# Altium PCB USB_CAN_Z69.PcbDoc
Units mm, origin at the board's own origin, x right, y up, seen from the top; angles counter-clockwise.
Board outline 43.25 x 41.95 mm, 2 copper layers (Top Layer, Bottom Layer); 36 components, 25 nets, 154 pads, 18 vias.
Unrouted connection lines stored in the file: 2.
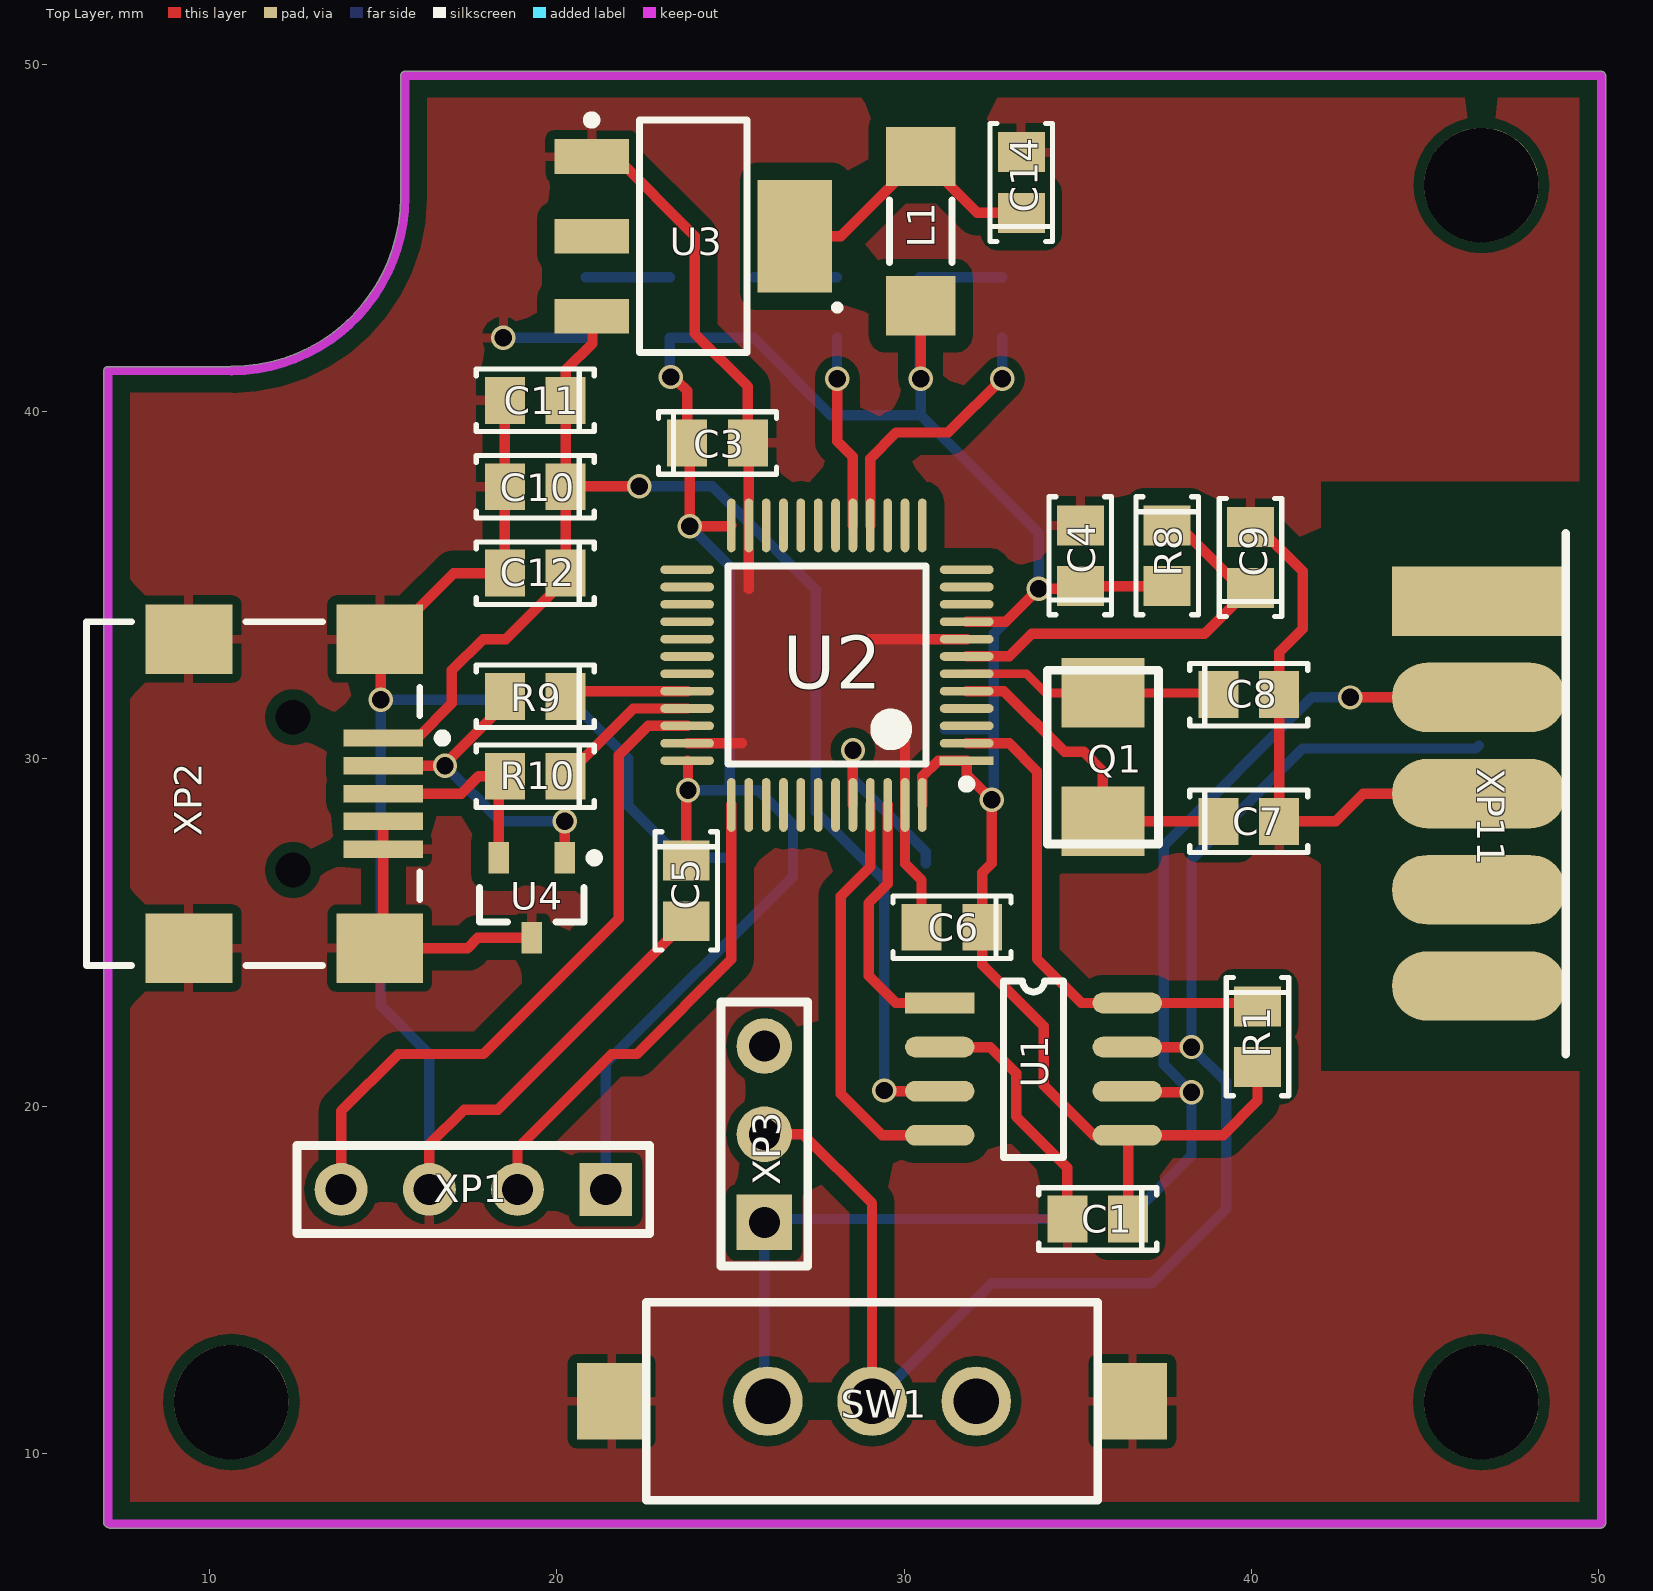
[diagram p0: Top Layer view]
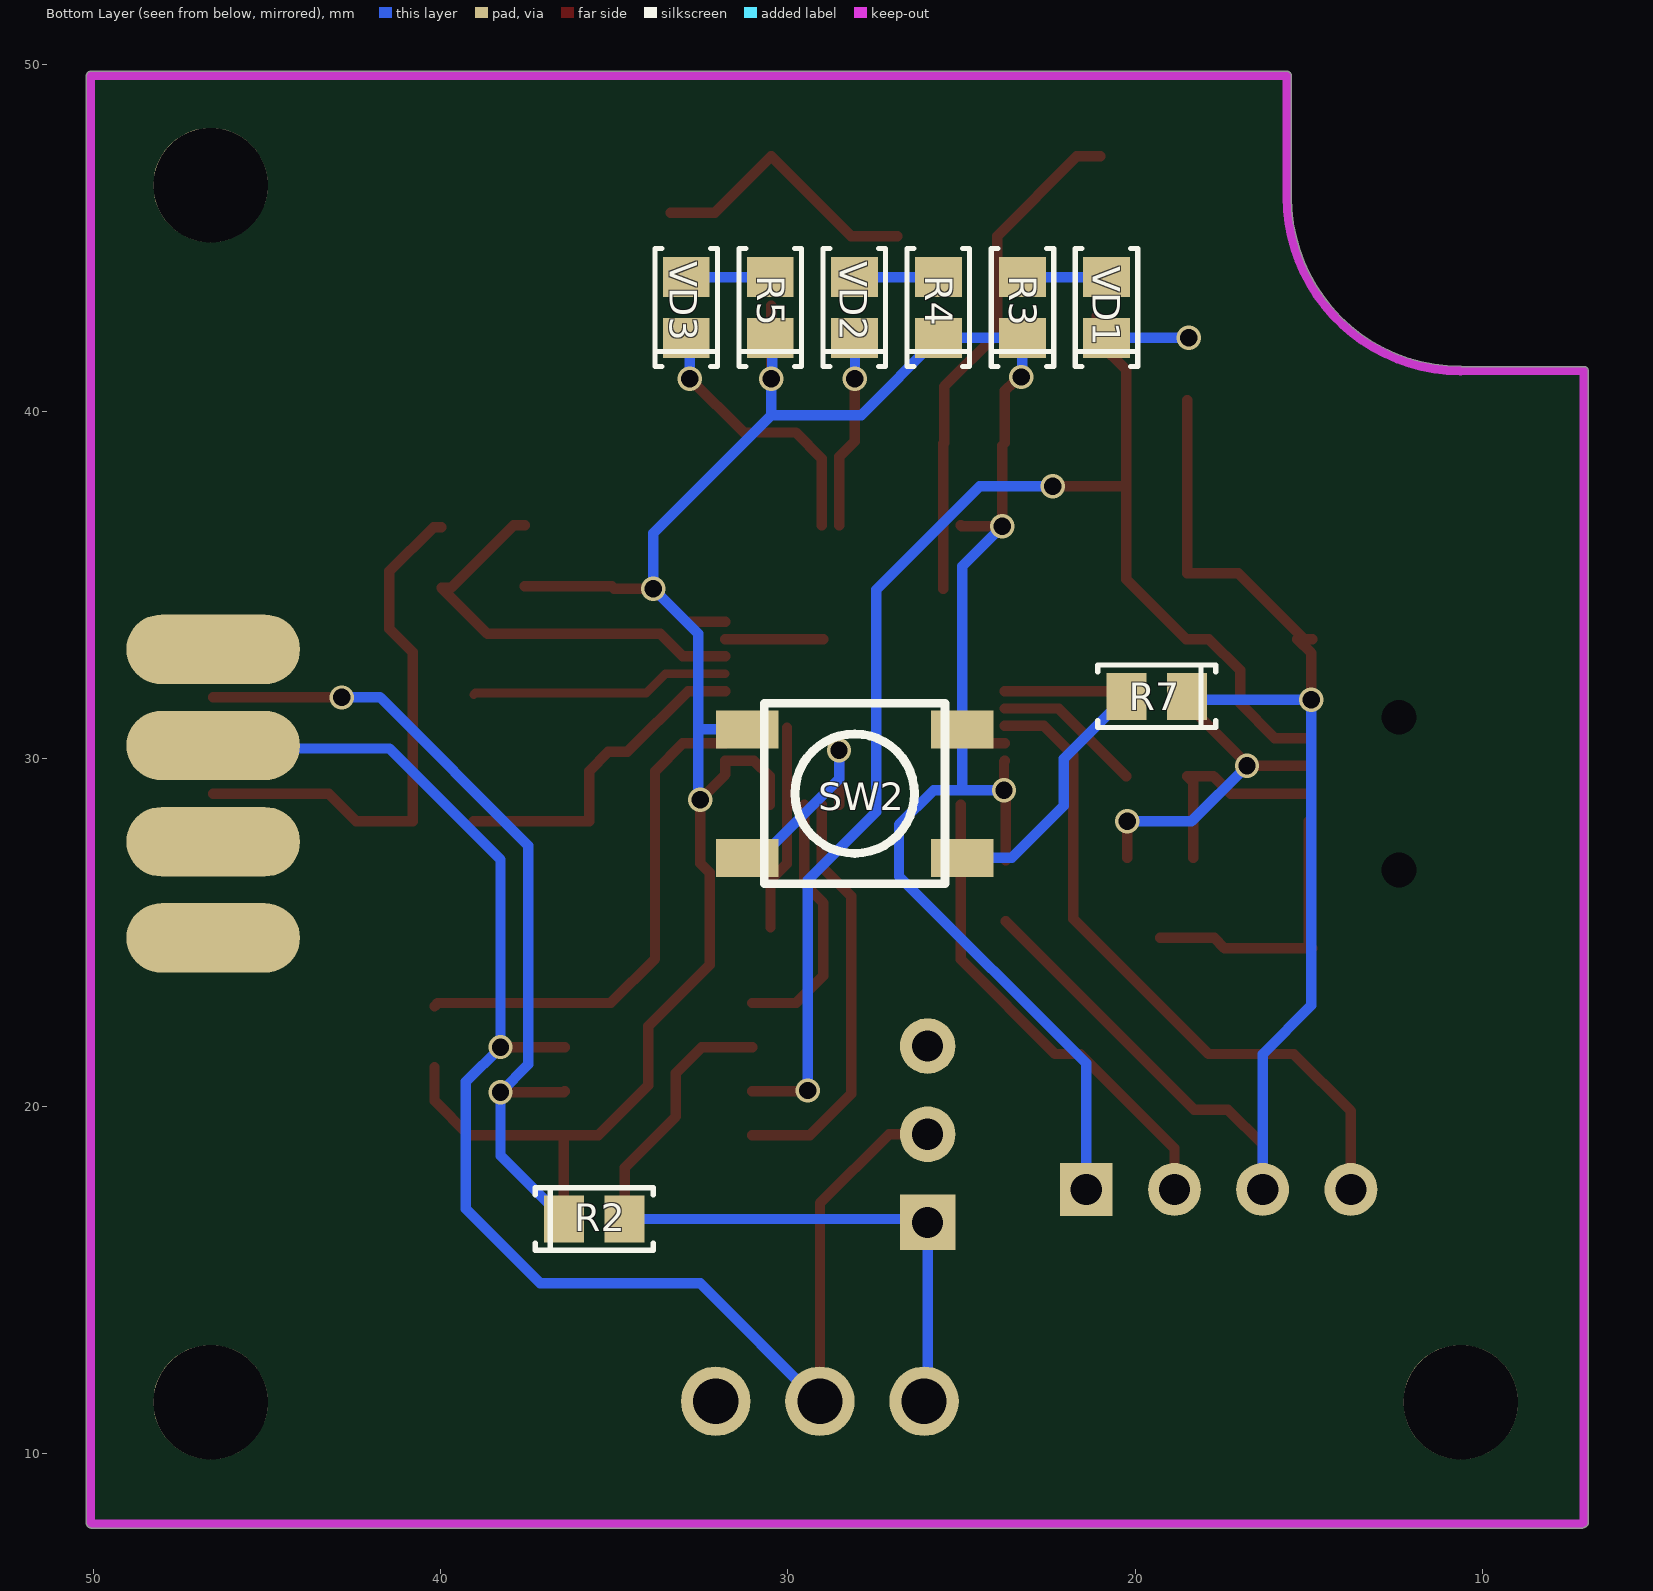
[diagram p1: Bottom Layer view, seen from below]

## Layer stack, top to bottom
Top Solder: solder mask 0.0102, Solder Resist, Dk 3.5
Top Layer: signal copper 0.0356
Dielectric 1: dielectric 0.32, FR-4, Dk 4.8
Bottom Layer: signal copper 0.0356
Bottom Solder: solder mask 0.0102, Solder Resist, Dk 3.5

## Board outline
7.045,7.878 cw(c7.075,8) 6.95,8 6.95,41.175 cw(c7.075,41.175) 7.075,41.3 10.603,41.3 cw(c10.625,41.175) 10.625,41.302 ccw(c10.625,46.175) 15.498,46.175 cw(c15.625,46.175) 15.5,46.197 15.5,49.675 cw(c15.625,49.675) 15.625,49.8 50.075,49.8 cw(c50.075,49.675) 50.2,49.675 50.2,8 cw(c50.075,8) 50.2,7.994 cw(c50.075,7.988) 50.2,7.988 cw(c50.075,7.988) 50.164,7.899 50.151,7.886 50.151,7.887 cw(c50.062,7.975) 50.062,7.85 7.125,7.85 cw(c7.125,7.975)

## Design rules (kind name [scope] priority, off if disabled: settings)
BoardOutlineClearance [OnLayer('Top Overlay')] p1: gap=0.254 ignorepadtopadclearanceinfootprint=FALSE except(0: Arc-SplitContinuation Track-SplitContinuation SMDPad-SplitContinuation THPad-SplitContinuation Via-SplitContinuation Fill-SplitContinuation Poly-SplitContinuation Region-SplitContinuation Text-SplitContinuation)
Clearance Clearance_1 [InNamedPolygon('Top Layer-GND')] p1: gap=0.254 ignorepadtopadclearanceinfootprint=FALSE except(0: Arc-Hole Track-Hole SMDPad-Hole THPad-Hole Via-Hole Fill-Hole Poly-Hole Region-Hole Text-Hole; 0.3: THPad-Fill THPad-Poly THPad-Region Via-Fill Via-Poly Via-Region; 0.4: Fill-Fill Fill-Poly Fill-Region Poly-Poly Poly-Region Region-Region; 0.5: Arc-Fill Arc-Poly Arc-Region Track-Fill Track-Poly Track-Region SMDPad-Fill SMDPad-Poly SMDPad-Region)
Clearance [All] p2: gap=0.254 ignorepadtopadclearanceinfootprint=FALSE except(0: Arc-Hole Track-Hole SMDPad-Hole THPad-Hole Via-Hole Fill-Hole Poly-Hole Region-Hole Text-Hole; 0.2: Arc-Arc Arc-Track Arc-SMDPad Track-Track Track-SMDPad SMDPad-SMDPad; 0.3: Via-Fill Via-Poly Via-Region Fill-Fill Fill-Poly Fill-Region Poly-Poly Poly-Region Region-Region; 0.4: Arc-Fill Arc-Poly Arc-Region Track-Fill Track-Poly Track-Region SMDPad-Fill SMDPad-Poly SMDPad-Region THPad-Fill THPad-Poly THPad-Region)
HoleSize [All] p1: absolutevalues=TRUE maxlimit=3 minlimit=0.3 maxpercent=80.000 minpercent=20.000
PolygonConnect [All] p1: connectstyle=Relief reliefconductorwidth=0.254 reliefentries=4 polygonreliefangle="90 Angle" airgapwidth=0.254
RoutingVias [All] p1: holewidth=0.5 width=0.7 viastyle="Through Hole" minholewidth=0.3 minwidth=0.5 maxholewidth=0.5 maxwidth=0.7
SolderMaskExpansion [All] p1: expansion=0.102
UnRoutedNet [All] p1: checkbadconnections=TRUE
Width [All] p1: maxlimit=0.4 minlimit=0.2 preferedwidth=0.25 minimp=50.000000 maximp=50.000000 favimp=50.000000
28 further rules are at their usual default settings.

## Classes and differential pairs
component class CAN: C1 R1 R2 SW1 U1 XP3 XP11
component class MCU: C3 C4 C5 C6 C7 C8 C9 Q1 R3 R4 R5 R7 R8 SW2 U2 VD1 VD2 VD3 XP1
component class PWR: C10 C11 C12 C14 L1 U3
component class USB: R9 R10 U4 XP2

## Components (designator, comment, footprint, x,y, rotation, side; value= is the part's Value field where it differs from the comment)
C1 "" SMD_0805 35.575,16.75 r180 top value=100nF
C3 "100nF" SMD_0805 24.625,39.1 r0 top
C4 "100nF" SMD_0805 35.075,35.85 r90 top
C5 "100nF" SMD_0805 23.725,26.2 r270 top
C6 "100nF" SMD_0805 31.375,25.15 r180 top
C7 "22pF" SMD_0805 39.925,28.2 r0 top
C8 "22pF" SMD_0805 39.925,31.85 r0 top
C9 "100nF" SMD_0805 39.975,35.8 r90 top
C10 "1uF" SMD_0805 19.375,37.837 r180 top
C11 "1uF" SMD_0805 19.375,40.325 r180 top
C12 "1uF" SMD_0805 19.375,35.35 r180 top
C14 "100n" SMD_0805 33.375,46.6 r90 top
L1 "" INDC4516AM 30.475,45.2 r270 top
Q1 "8MHz" 5032-2Pin_CRYSTAL 35.725,30.05 r90 top
R1 "10k" SMD_0805 40.175,22 r270 top
R2 "120" SMD_0805 35.575,16.75 r180 bottom
R3 "10k" SMD_0805 23.245,43 r90 bottom
R4 "10k" SMD_0805 25.665,43 r90 bottom
R5 "10k" SMD_0805 30.505,43 r90 bottom
R7 "10k" SMD_0805 19.375,31.8 r0 bottom
R8 "10k" SMD_0805 37.575,35.85 r270 top
R9 "22" SMD_0805 19.375,31.8 r180 top
R10 "22" SMD_0805 19.375,29.5 r180 top
SW1 "SW" SW_SLIDE 29.075,11.5 r0 top
SW2 "" SW_SMD 28.075,29 r180 bottom
U1 "TJA1051" SO8-150mil 31.025,22.97 r0 top
U2 "STM32F072C8T6" STM-LQFP48_L 27.775,32.7 r180 top
U3 "AMS1117" SOT-223 23.925,45.05 r0 top
U4 "CDSOT23-SM712" SOT23-3 19.275,26 r270 top
VD1 "" SMD_0805 20.825,43 r90 bottom
VD2 "" SMD_0805 28.085,43 r90 bottom
VD3 "" SMD_0805 32.925,43 r90 bottom
XP1 "CON_4" HEAD-1/4/2.54 21.405,17.6 r270 top
XP2 "USB" USB/SM0.8-6H5 7.15,29 r180 top locked
XP3 "CON_3" PLS-2.54/3 25.975,16.65 r90 top
XP11 "DB9F_EDGE" DSUB-9_F_Edge 46.55,29 r90 top locked

## Footprints (in the part's own frame and the unit in brackets; to place one, negate y for a bottom-side part, rotate by r counter-clockwise, add the part's x,y. Pads: shape width x height; smd on the part's side, far side on the other; paste and mask are expansions set on the pad)
5032-2Pin_CRYSTAL [mm]
  rect 2x2.4 smd: 1(-1.85,0) 2(1.85,0)
  silkscreen extent -2.5,-1.6 2.5,1.6
DSUB-9_F_Edge [mm]
  rect 2x5 smd: 1(5.54,0)
  oval 2x5 smd: 2(2.77,0) 3(0,0) 4(-2.77,0) 5(-5.54,0)
  oval 2x5 smd far side: 6(4.155,0) 7(1.385,0) 8(-1.385,0) 9(-4.155,0)
  silkscreen extent -7.5,-2.5 7.5,-2.5, body extent -15.41,-14.45 15.4,0.65, height 6.21
HEAD-1/4/2.54 [mil]
  rect 60x60 hole 35.43: 1(0,0)
  round 60 hole 35.43: 2(0,-100) 3(0,-200) 4(0,-300)
  silkscreen extent -50,-350 50,50
INDC4516AM [mm] "Chip Inductor, Body 4.5x1.6mm, IPC Low Density"
  rect 1.7x2 smd: 1(-2.15,0) 2(2.15,0)
  silkscreen extent -0.9,-0.9 0.9,0.9, body extent -2.4,-0.95 2.4,0.95, height 1.8
PLS-2.54/3 [mm]
  rect 1.6x1.6 hole 0.9: 1(0,0)
  round 1.6 hole 0.9: 2(2.54,0) 3(5.08,0)
  silkscreen extent -1.25,-1.25 6.35,1.25
SMD_0805 [mm] "Chip smd, 2-Leads, Body 2.00x1.25mm, IPC Medium Density"
  rect 1.15x1.35 smd: 1(-0.875,0) 2(0.875,0)
  silkscreen extent -1.7,-0.9 1.7,0.9
SO8-150mil [mm]
  rect 2x0.6 smd: 1(0,0)
  oval 2x0.6 smd: 2(0,-1.27) 3(0,-2.54) 4(0,-3.81) 5(5.4,-3.81) 6(5.4,-2.54) 7(5.4,-1.27) 8(5.4,0)
  silkscreen extent 1.84,-4.44 3.56,0.64, body extent -0.36,-4.41 5.84,0.6, height 1.75
SOT23-3 [mm]
  rect 0.9x0.6 smd: 1(-1.15,0.95) 2(-1.15,-0.95) 3(1.15,0)
  silkscreen extent -1.27,-1.5 0.7,1.93, body extent -0.7,-1.5 0.7,1.5, height 1.1
SOT-223 [mm]
  rect 2.15x1 smd: 1(-2.925,2.3) 2(-2.925,0) 3(-2.925,-2.3)
  rect 2.15x3.25 smd: 4(2.925,0)
  silkscreen extent -3.05,-3.35 1.55,3.47, body extent -1.85,-3.35 1.85,3.35, height 1.8
STM-LQFP48_L [mm] "QFP, 48-Leads, Body 7x7mm, Pitch 0.5mm, IPC High Density"
  rect 1.55x0.25 smd: 1(-4.025,2.75)
  oval 1.55x0.25 smd: 2(-4.025,2.25) 3(-4.025,1.75) 4(-4.025,1.25) 5(-4.025,0.75) 6(-4.025,0.25) 7(-4.025,-0.25) 8(-4.025,-0.75) 9(-4.025,-1.25) 10(-4.025,-1.75) 11(-4.025,-2.25) 12(-4.025,-2.75) 25(4.025,-2.75) 26(4.025,-2.25) 27(4.025,-1.75) 28(4.025,-1.25) 29(4.025,-0.75) 30(4.025,-0.25) 31(4.025,0.25) 32(4.025,0.75) 33(4.025,1.25) 34(4.025,1.75) 35(4.025,2.25) 36(4.025,2.75)
  oval 0.25x1.55 smd: 13(-2.75,-4.025) 14(-2.25,-4.025) 15(-1.75,-4.025) 16(-1.25,-4.025) 17(-0.75,-4.025) 18(-0.25,-4.025) 19(0.25,-4.025) 20(0.75,-4.025) 21(1.25,-4.025) 22(1.75,-4.025) 23(2.25,-4.025) 24(2.75,-4.025) 37(2.75,4.025) 38(2.25,4.025) 39(1.75,4.025) 40(1.25,4.025) 41(0.75,4.025) 42(0.25,4.025) 43(-0.25,4.025) 44(-0.75,4.025) 45(-1.25,4.025) 46(-1.75,4.025) 47(-2.25,4.025) 48(-2.75,4.025)
  silkscreen extent -4.15,-2.85 2.85,3.55, body extent -3.5,-3.5 3.5,3.5, height 1.6
SW_SLIDE [mm]
  round 2 hole 1.3: 1(-3,0) 2(0,0) 3(3,0)
  rect 2x2.2 smd: 4(7.5,0) 5(-7.5,0)
  silkscreen extent -6.5,-2.85 6.5,2.85, body extent -6.5,-9.35 6.5,2.85, height 6.05
SW_SMD [mm]
  rect 1.8x1.1 smd: 1(-3.1,1.85) 2(3.1,1.85) 3(-3.1,-1.85) 4(3.1,-1.85)
  silkscreen extent -2.6,-2.6 2.6,2.6, body extent -3.2,-2.6 3.2,2.6, height 1.5
USB/SM0.8-6H5 [mm] "Connector; USB2.0, Type B, SM; 5 Position; Right Angle"
  rect 2.3x0.5 smd: 1(-7.85,-1.6) 2(-7.85,-0.8) 3(-7.85,0) 4(-7.85,0.8) 5(-7.85,1.6)
  rect 2.5x2 smd: 6(-7.75,4.45) 7(-2.25,4.45) 8(-7.75,-4.45) 9(-2.25,-4.45)
  round 0.6 hole 1 unplated: MH1(-5.25,2.2) MH2(-5.25,-2.2)
  silkscreen extent -9.68,-4.95 0.7,4.95, body extent -8.9,-4.95 0.7,4.95, height 3.9

## Part data
C1 C3 C4 C5 C6 C7 C8 C9 C10 C11 C12 C14: library part C_NONE_POLAR, "None polar capacitor"
L1: library part FB
Q1: library part CRYSTAL, "Crystal oscillator"
R1 R2 R3 R4 R5 R7 R8 R9 R10: library part RES, "Resistor"
SW1: "Switch"
SW2: library part SW_SMD, Manufacture=Ninigi, HelpURL=https://www.rcscomponents.kiev.ua/datasheets/tactm-idatasheet-63n.pdf, Model=TACT-63N-F
U2: "ARM Cortex-M0 32-bit MCU, 64 KB Flash, 8 KB Internal RAM, 39 I/Os, 48-pin LQFP, -40 to 85 degC, Tray", I/Os (High Current)=39, Operating Frequency(F) (Processor speed) (MHz)=48, PartNumber=STM32F030C8T6, Supplier Part Number 1=497-14043-ND, Supply Voltage(Vcc) min (V)=2.4, ComponentLink1Description="Manufacturer URL", ComponentLink1URL=http://www.st.com/web/en/home.html, ComponentLink2Description=Datasheet, ComponentLink2URL=http://www.st.com/st-web-ui/static/active/en/resource/technical/document/datasheet/DM00088500.pdf, ComponentLink3Description="Package Specification", ComponentLink3URL=http://www.st.com/st-web-ui/static/active/en/resource/technical/document/datasheet/DM00058181.pdf, Core="ARM Cortex-M0", DatasheetVersion="Rev. 1", FLASH Size (Prog) (kB)=64, Internal RAM Size (kB)=8, Mounting Technology="Surface Mount", PackageDescription="48-Pin Low Profile Quad Flat Package, 7 x 7 mm Body, 0.5 mm Pitch", PackageReference=LQFP48, PackageVersion="Rev. 6, 06/2013", Packing=Tray, Supplier 1=Digi-Key, Supplier 2=Newark, Supplier 3=Mouser, Supplier Part Number 2=06X3647, Supplier Part Number 3=511-STM32F030C8T6
VD1 VD2 VD3: library part LED

## Free pads (board coordinates)
  round 3.3 hole 3.3 unplated: MH1(10.625,11.475) MH2(46.625,11.475) MH3(46.625,46.525)

## Via types
v1: diameter 0.7, hole 0.5, Top Layer to Bottom Layer, tented both sides, 18 vias

## Nets (pads, with @x,y where several pads share a name; then routed paths per layer and width w, separated by ;. In a path a pad name is that pad's centre, name@x,y a point inside that pad or via, vN(x,y) a via of type N, cw(c..) or ccw(c..) an arc to the next point about the centre after c; other vN are vias at no path point)
+3V3: C1.1 C3.1 C4.1 C5.1 C6.1 L1.2 R1.2 R3.1 R4.1 R5.1 R8.2 SW2.1 SW2.2 U1.5 U2.1 U2.9 U2.24 U2.36 U2.48 XP1.1 | length 90.6
  Top Layer w0.3: v1@23.275,40.85 23.5,40.85 23.75,40.6 C3.1 23.825,39.025 v1(23.825,36.7) 25,36.7 U2.24 ; C5.1 23.725,29.05 v1(23.775,29.1) 23.775,29.925 U2.36 ; v1(30.475,40.95) L1.2 ; U2.48 30.525,29.5 30.975,29.95 U2.1 31.8,29.55 v1(32.525,28.825) 32.525,27 32.25,26.725 C6.1 32.25,24.075 34.025,22.3 34.025,20.6 35.465,19.16 U1.5 ; U2.9 32.925,33.95 v1(33.875,34.9) 35,34.9 C4.1 R8.2 ; C1.1 36.45,19.135 U1.5 ; R1.2 40.175,20.15 39.185,19.16 U1.5
  Bottom Layer w0.3: XP1.1 21.405,21.23 26.8,26.625 26.8,28.1 25.8,29.1 v1(23.775,29.1) ; v1@23.225,41 v1(23.275,41) 23.245,41.03 R3.1 R4.1 27.89,39.9 30.475,39.9 ; v1(23.825,36.7) 24.975,35.55 SW2.2 24.975,29.125 24.95,29.1 ; R5.1@30.445,42.125 30.445,40.98 v1(30.475,40.95) 30.475,39.9 ; SW2.1 32.575,30.85 ; v1(32.525,28.825) 32.525,28.8 32.575,28.85 32.575,30.85 ; 30.475,39.9 33.875,36.5 v1(33.875,34.9) 32.575,33.6 32.575,30.85
+5V: C10.1 C11.1 C12.1 U1.3 U3.3 XP2.1 | length 40.9
  Top Layer w0.3: XP2.1 15.975,30.6 16.975,31.6 16.975,32.55 17.875,33.45 18.525,33.45 20.25,35.175 C12.1 C10.1 ; U3.3@21.1,42.75 21.025,42.675 21.025,41.975 20.25,41.2 C11.1 C10.1 ; v1(22.375,37.85) 20.263,37.85 C10.1 ; v1(29.425,20.45) 29.445,20.43 U1.3
  Bottom Layer w0.3: v1(22.375,37.85) 24.475,37.85 27.45,34.875 27.45,28.475 29.425,26.5 v1(29.425,20.45)
CAN_S: R1.1 U1.8 U2.2 | length 14.7
  Top Layer w0.3: U2.2 33.025,30.45 33.825,29.65 33.825,24.25 35.105,22.97 U1.8 40.08,22.97 R1.1
GND: C1.2 C3.2 C4.2 C5.2 C6.2 C7.2 C8.2 C9.2 C10.2 C11.2 C12.2 C14.2 R7.1 SW1.4 SW1.5 U1.2 U2.8 U2.23 U2.35 U2.47 U3.1 U4.3 VD1.1 XP1.3 XP2.4 XP2.5 XP2.6 XP2.7 XP2.8 XP2.9 XP11.3 | length 99.7
  Top Layer w0.3: XP2.8 XP2.8@15.125,33.45 ; v1(14.925,31.7) 14.925,33.05 15.325,33.45 XP2.8@15.125,33.45 ; XP2.4 XP2.5 15,24.65 XP2.6 17.425,24.55 17.725,24.85 U4.3 ; XP1.3 16.325,18.9 17.325,19.9 18.3,19.9 C5.2 ; C11.2 C10.2 C12.2 17.025,35.35 XP2.8@15.125,33.45 ; U3.1 21.675,47.35 23.975,45.05 23.975,42.25 25.5,40.725 C3.2 25.525,39.075 U2.23 25.525,34.9 ; U2.35 25.325,30.45 ; 28.975,33.45 U2.8 ; 30.025,30.9 U2.47 30.025,26.975 30.5,26.5 C6.2 ; U1.2 32.475,21.7 33.225,20.95 33.225,19.7 34.7,18.225 C1.2 ; C9.2 40.2,36.675 41.475,35.4 41.475,33.75 40.8,33.075 C8.2 C7.2 42.425,28.2 43.225,29 XP11.3
  Bottom Layer w0.3: XP1.3 16.325,21.5 14.925,22.9 v1(14.925,31.7) 18.3,31.7 18.45,31.85 R7.1 ; v1(18.45,42.125) VD1.1
LED1: U2.16 VD3.1 | length 7.9
  Top Layer w0.3: U2.16 29.025,38.65 29.775,39.4 31.275,39.4 v1(32.825,40.95)
  Bottom Layer w0.3: v1(32.825,40.95) VD3.1@32.825,42.125
LED2: U2.17 VD2.1 | length 5.6
  Top Layer w0.3: v1@28.075,40.9 28.075,39.15 28.525,38.7 U2.17
  Bottom Layer w0.3: VD2.1@28.065,42.125 28.065,40.91 v1@28.075,40.9
  other v1: 28.075,40.95
NetC7_1: C7.1 Q1.1 U2.5 | length 9.7
  Top Layer w0.3: U2.5 32.875,31.95 34.625,30.2 35.175,30.2 35.725,29.65 Q1.1 C7.1
NetC8_1: C8.1 Q1.2 U2.6 | length 7.5
  Top Layer w0.25: U2.6 33.525,32.45 34.075,31.9 Q1.2 39,31.9 C8.1
NetC9_1: C9.1 R8.1 U2.7 | length 12.1
  Top Layer w0.3: U2.7 33.025,32.95 33.675,33.6 38.65,33.6 C9.1 39.7,34.925 37.9,36.725 R8.1
NetC14_1: C14.1 L1.1 U3.2 U3.4 | length 8.2
  Top Layer w0.3: U3.4 28.175,45.05 L1.1 32.1,45.725 C14.1
NetR2_1: R2.1 U1.6 XP11.2 | length 24.4
  Top Layer w0.3: U1.6 36.455,20.4 v1(38.275,20.4) ; v1@42.945,31.77 XP11.2
  Bottom Layer w0.3: R2.1 38.275,18.575 v1(38.275,20.4) 37.475,21.2 37.475,27.5 41.745,31.77 v1(42.845,31.77)
NetR2_2: R2.2 SW1.1 XP3.1 | length 14.7
  Bottom Layer w0.3: SW1.1@26.075,11 25.975,11.1 25.975,16.91 26.135,16.75 R2.2
NetR3_2: R3.2 VD1.2 | length 2.4
  Bottom Layer w0.3: VD1.2 R3.2
NetR4_2: R4.2 VD2.2 | length 2.4
  Bottom Layer w0.3: R4.2@25.685,43.875 VD2.2@28.065,43.875
NetR5_2: R5.2 VD3.2 | length 2.4
  Bottom Layer w0.3: R5.2@30.445,43.875 VD3.2@32.825,43.875
NetR7_2: R7.2 SW2.3 SW2.4 U2.44 | length 13.1
  Top Layer w0.3: U2.44 v1(28.525,30.25)
  Bottom Layer w0.3: R7.2 22.05,30 22.05,28.65 23.55,27.15 SW2.4 ; v1(28.525,30.25) 28.525,29.425 30.625,27.325 SW2.3@30.625,27
NetR9_2: R9.2 U4.1 XP2.2 | length 9.7
  Top Layer w0.3: XP2.2 v1(16.775,29.8) 16.775,29.85 18.5,31.575 R9.2 ; U4.1 20.225,28.05 v1(20.225,28.2)
  Bottom Layer w0.3: v1(16.775,29.8) 18.375,28.2 v1(20.225,28.2)
NetR10_2: R10.2 U4.2 XP2.3 | length 6.1
  Top Layer w0.3: XP2.3 17.241,29 17.741,29.5 R10.2 18.325,29.325 U4.2
NetSW1_1: SW1.2 U1.7 XP3.2 XP11.7 | length 45
  Top Layer w0.3: XP3.2 27.085,19.19 29.075,17.2 SW1.2@29.075,11 ; U1.7 v1(38.275,21.7)
  Bottom Layer w0.3: SW1.2@29.075,11 29.075,11.45 32.525,14.9 37.125,14.9 39.275,17.05 39.275,20.7 v1(38.275,21.7) 38.275,27.1 41.475,30.3 46.465,30.3 XP11.7
NetU1_1: U1.1 U2.46 | length 7.5
  Top Layer w0.3: U2.46 29.525,26.4 28.975,25.85 28.975,23.75 29.755,22.97 U1.1
NetU1_4: U1.4 U2.45 | length 12
  Top Layer w0.3: U2.45 29.025,26.9 28.175,26.05 28.175,20.35 29.365,19.16 U1.4
SWCLK: U2.37 XP1.2 | length 14.1
  Top Layer w0.3: XP1.2 18.865,18.79 21.575,21.5 22.3,21.5 25.025,24.225 U2.37
SWDIO: U2.34 XP1.4 | length 19.6
  Top Layer w0.3: XP1.4 13.785,19.86 15.425,21.5 17.875,21.5 21.775,25.4 21.775,30.1 22.625,30.95 U2.34
USB_DM: R9.1 U2.32 | length 3.6
  Top Layer w0.3: R9.1 20.4,31.95 U2.32
USB_DP: R10.1 U2.33 | length 4.3
  Top Layer w0.3: R10.1 22.2,31.45 U2.33
pads on no net: SW1.3 U2.3 U2.4 U2.10 U2.11 U2.12 U2.13 U2.14 U2.15 U2.18 U2.19 U2.20 U2.21 U2.22 U2.25 U2.26 U2.27 U2.28 U2.29 U2.30 U2.31 U2.38 U2.39 U2.40 U2.41 U2.42 U2.43 XP2.MH1 XP2.MH2 XP3.3 XP11.1 XP11.4 XP11.5 XP11.6 XP11.8 XP11.9

## Polygon pours and split planes (outlines as drawn)
GND on Top Layer "GND_L01_P000" (solid, pour order 0): 25.025,35.5 25.025,29.9 30.525,29.9 30.525,35.5
GND on Top Layer "Top Layer-GND" (solid, remove dead copper, pour order 2): 7.075,50 7.075,8 50.062,8 50.062,50

## Keep-outs
Keep-Out Layer:
  lines w0.25: 7.075,8 7.075,41.175 10.625,41.175 ; 7.125,7.975 50.062,7.975 50.075,7.988 ; 15.625,46.175 15.625,49.675 50.075,49.675 50.075,8
  lines w0.254: 10.625,41.175 ccw(c10.625,46.175) 15.625,46.175

## Other copper
Top Layer:
  pour cut-out: 7.075,50 7.075,41.175 12.25,41.175 15.075,44 15.075,46.45 15.075,47.042 15.075,47.55 15.075,50
  pour cut-out: 49.45,38 42,38 42,21 50,21 50.075,38 49,38

## Silkscreen, mask and mechanical layers (free items; w line width, h text height)
Top Overlay:
  circle w0.254: c28.075,43 r0.05
Drill Drawing:
  lines w0.254: 8.521,60.663 8.521,61.087 8.944,61.51 8.521,61.933 8.521,62.357 8.944,62.357 9.368,61.933 9.791,62.357 10.214,62.357 10.214,61.933 9.791,61.51 10.214,61.087 10.214,60.663 9.791,60.663 9.368,61.087 8.944,60.663 8.521,60.663 ; 8.521,65.32 9.368,64.473 10.214,65.32 9.368,66.167 8.521,65.32 ; 8.521,68.707 8.944,68.707 8.944,68.283 9.791,68.283 9.791,68.707 10.214,68.707 10.214,69.553 9.791,69.553 9.791,69.977 8.944,69.977 8.944,69.553 8.521,69.553 8.521,68.707 ; 8.521,73.787 10.214,73.787 9.368,72.093 8.521,73.787 ; 8.521,75.903 10.214,75.903 10.214,77.597 8.521,77.597 8.521,75.903
  lines w0.381: 7.002,59.52 277.539,59.52 ; 7.002,78.57 277.539,78.57 ; 20.995,55.71 20.995,82.38 ; 34.707,55.71 34.707,82.38 ; 64.416,55.71 64.416,82.38 ; 77.266,55.71 77.266,82.38 ; 95.904,55.71 95.904,82.38 ; 133.993,55.71 133.993,82.38 ; 148.975,55.71 148.975,82.38 ; 167.918,55.71 167.918,82.38 ; 186.963,55.71 186.963,82.38 ; 208.648,55.71 208.648,82.38 ; 242.522,55.71 242.522,82.38 ; 7.002,55.71 277.539,55.71 277.539,82.38 7.002,82.38 7.002,55.71
  text "Symbol" at 9.288,79.713 h1.83
  text "Count" at 22.138,79.713 h1.83
  text "Hole Size" at 35.85,79.713 h1.83
  text "Plated" at 65.559,79.713 h1.83
  text "Hole Type" at 78.409,79.713 h1.83
  text "Drill Layer Pair" at 97.047,79.713 h1.83
  text "Via/Pad" at 135.136,79.713 h1.83
  text "Pad Shape" at 150.118,79.713 h1.83
  text "Template" at 169.061,79.713 h1.83
  text "Description" at 188.106,79.713 h1.83
  text "Hole Tolerance (+)" at 209.791,79.713 h1.83
  text "Hole Tolerance (-)" at 243.665,79.713 h1.83
  text "2" at 22.138,75.903 h1.52
  text "1,000mm (39,37mil)" at 35.85,75.903 h1.52
  text "NPTH" at 65.559,75.903 h1.52
  text "Round" at 78.409,75.903 h1.52
  text "Top Layer - Bottom Layer" at 97.047,75.903 h1.52
  text "Pad" at 135.136,75.903 h1.52
  text "Rounded" at 150.118,75.903 h1.52
  text "c60hn100" at 169.061,75.903 h1.52
  text "3" at 22.138,72.093 h1.52
  text "1,300mm (51,18mil)" at 35.85,72.093 h1.52
  text "PTH" at 65.559,72.093 h1.52
  text "Round" at 78.409,72.093 h1.52
  text "Top Layer - Bottom Layer" at 97.047,72.093 h1.52
  text "Pad" at 135.136,72.093 h1.52
  text "Rounded" at 150.118,72.093 h1.52
  text "c200h130" at 169.061,72.093 h1.52
  text "3" at 22.138,68.283 h1.52
  text "3,300mm (129,92mil)" at 35.85,68.283 h1.52
  text "NPTH" at 65.559,68.283 h1.52
  text "Round" at 78.409,68.283 h1.52
  text "Top Layer - Bottom Layer" at 97.047,68.283 h1.52
  text "Pad" at 135.136,68.283 h1.52
  text "Rounded" at 150.118,68.283 h1.52
  text "c330hn330" at 169.061,68.283 h1.52
  text "7" at 22.138,64.473 h1.52
  text "0,900mm (35,43mil)" at 35.85,64.473 h1.52
  text "PTH" at 65.559,64.473 h1.52
  text "Round" at 78.409,64.473 h1.52
  text "Top Layer - Bottom Layer" at 97.047,64.473 h1.52
  text "Pad" at 135.136,64.473 h1.52
  text "(Mixed)" at 150.118,64.473 h1.52
  text "(Mixed)" at 169.061,64.473 h1.52
  text "18" at 22.138,60.663 h1.52
  text "0,500mm (19,69mil)" at 35.85,60.663 h1.52
  text "PTH" at 65.559,60.663 h1.52
  text "Round" at 78.409,60.663 h1.52
  text "Top Layer - Bottom Layer" at 97.047,60.663 h1.52
  text "Via" at 135.136,60.663 h1.52
  text "Rounded" at 150.118,60.663 h1.52
  text "v70h50m0mx0" at 169.061,60.663 h1.52
  text "33 Total" at 22.138,56.853 h1.52

## Text inside footprints (layer, text, board x,y; h text height)
SW1: Mechanical 13 "Edge" at 23.225,8.85 h0.8
XP2: Mechanical 1 "PCB Edge" at 6.718,33.036 h0.25 r270